# Altium PCB SDC-LE-A3L.PcbDoc
Units mil, origin at the board's own origin, x right, y up, seen from the top; angles counter-clockwise.
Board outline 6000 x 4000 mil, 2 copper layers (Top Layer, Bottom Layer); 1 components, 0 nets, 36 pads, 0 vias.
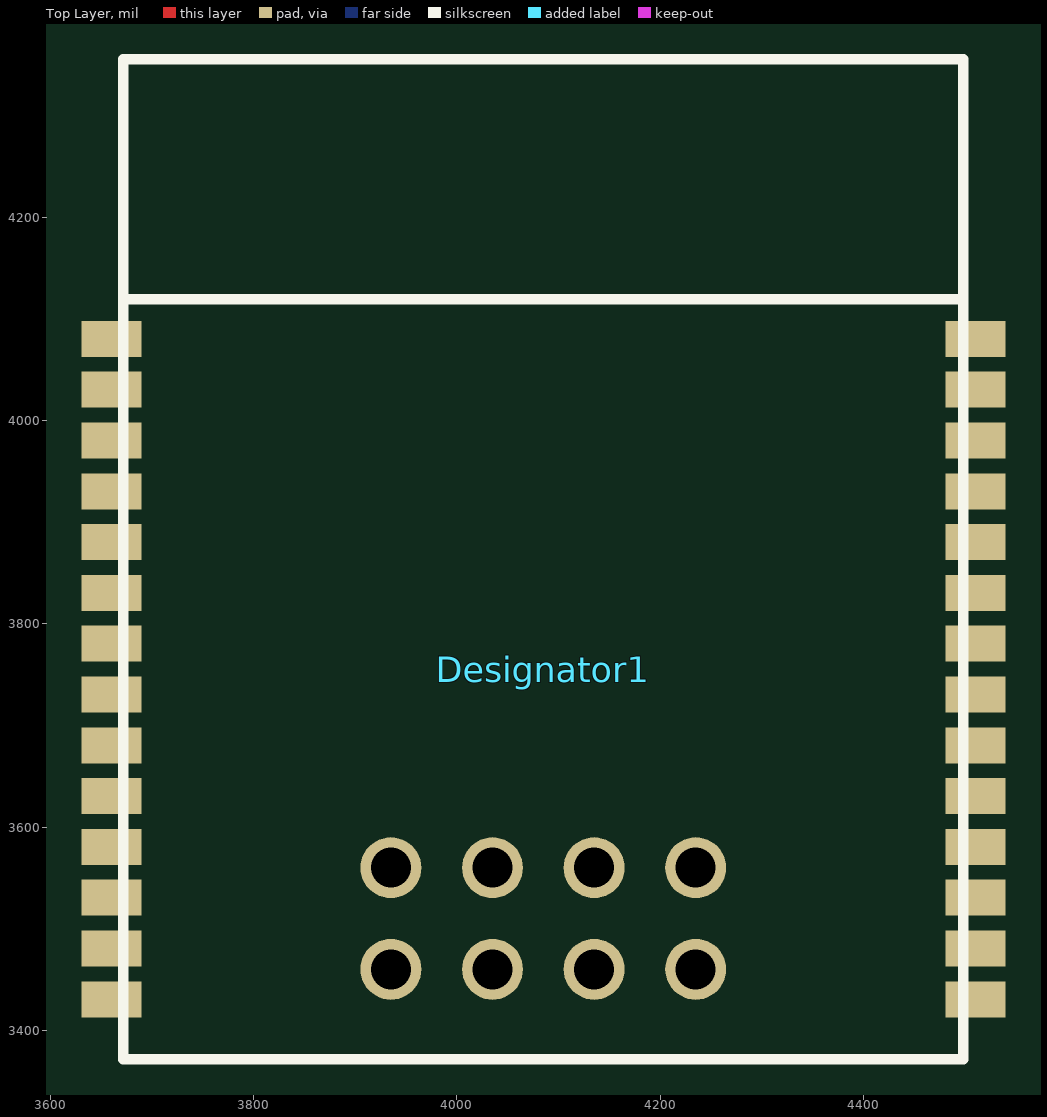
[diagram p0: Top Layer view]
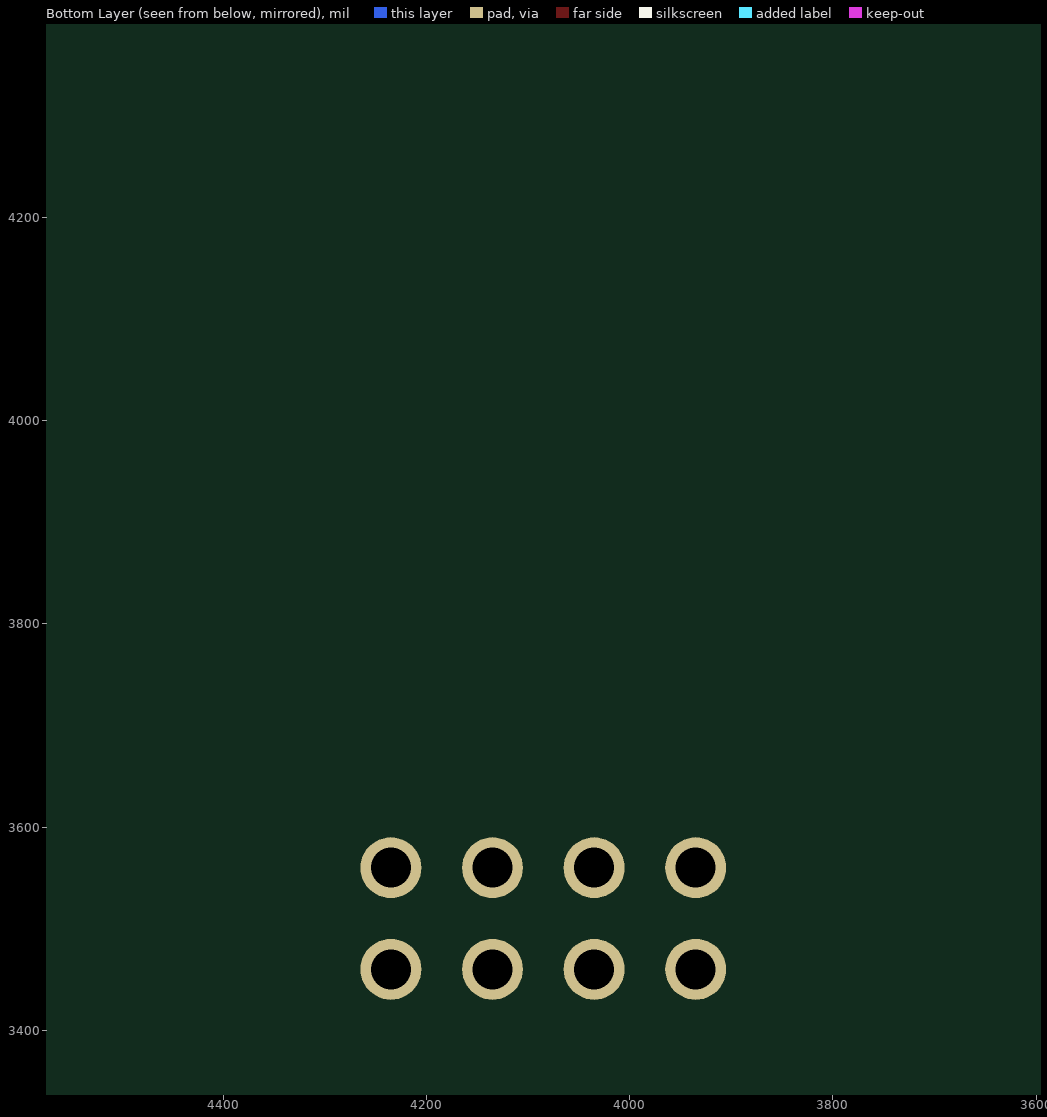
[diagram p1: Bottom Layer view, seen from below]

## Layer stack, top to bottom
Top Solder: solder mask 0.4, Solder Resist, Dk 3.5
Top Layer: signal copper 1.4
Dielectric 1: dielectric 12.6, FR-4, Dk 4.8
Bottom Layer: signal copper 1.4
Bottom Solder: solder mask 0.4, Solder Resist, Dk 3.5

## Board outline
1000,1000 7000,1000 7000,5000 1000,5000

## Design rules (kind name [scope] priority, off if disabled: settings)
Clearance [All] p1: gap=10 ignorepadtopadclearanceinfootprint=FALSE
PolygonConnect [All] p1: connectstyle=Relief reliefconductorwidth=10 reliefentries=4 polygonreliefangle="90 Angle" airgapwidth=10
RoutingVias [All] p1: holewidth=28 width=50 viastyle="Through Hole" minholewidth=28 minwidth=50 maxholewidth=28 maxwidth=50
SolderMaskExpansion [All] p1: expansion=4 istentingtop=FALSE
Width [All] p1: maxlimit=10 minlimit=10 preferedwidth=10
30 further rules are at their usual default settings.

## Components (designator, comment, footprint, x,y, rotation, side; value= is the part's Value field where it differs from the comment)
Designator1 "Comment" B07 4085,3371.42 r0 top

## Footprints (in the part's own frame and the unit in brackets; to place one, negate y for a bottom-side part, rotate by r counter-clockwise, add the part's x,y. Pads: shape width x height; smd on the part's side, far side on the other; paste and mask are expansions set on the pad)
B07 [mm]
  rect 1.5x0.9 smd: 1(-10.8,18.01) 2(-10.8,16.74) 3(-10.8,15.47) 4(-10.8,14.2) 5(-10.8,12.93) 6(-10.8,11.66) 7(-10.8,10.39) 8(-10.8,9.12) 9(-10.8,7.85) 10(-10.8,6.58) 11(-10.8,5.31) 12(-10.8,4.04) 13(-10.8,2.77) 14(-10.8,1.5) 15(10.8,1.5) 16(10.8,2.77) 17(10.8,4.04) 18(10.8,5.31) 19(10.8,6.58) 20(10.8,7.85) 21(10.8,9.12) 22(10.8,10.39) 23(10.8,11.66) 24(10.8,12.93) 25(10.8,14.2) 26(10.8,15.47) 27(10.8,16.74) 28(10.8,18.01)
  round 1.524 hole 1: 29(3.81,4.79) 30(3.81,2.25) 31(1.27,4.79) 32(1.27,2.25) 33(-1.27,4.79) 34(-1.27,2.25) 35(-3.81,4.79) 36(-3.81,2.25)
  silkscreen extent -10.5,0 10.5,25

## Nets (pads, with @x,y where several pads share a name; then routed paths per layer and width w, separated by ;. In a path a pad name is that pad's centre, name@x,y a point inside that pad or via, vN(x,y) a via of type N, cw(c..) or ccw(c..) an arc to the next point about the centre after c; other vN are vias at no path point)
pads on no net: Designator1.1 Designator1.2 Designator1.3 Designator1.4 Designator1.5 Designator1.6 Designator1.7 Designator1.8 Designator1.9 Designator1.10 Designator1.11 Designator1.12 Designator1.13 Designator1.14 Designator1.15 Designator1.16 Designator1.17 Designator1.18 Designator1.19 Designator1.20 Designator1.21 Designator1.22 Designator1.23 Designator1.24 Designator1.25 Designator1.26 Designator1.27 Designator1.28 Designator1.29 Designator1.30 Designator1.31 Designator1.32 Designator1.33 Designator1.34 Designator1.35 Designator1.36